# Altium PCB ESP32_Baseline_MCU.PcbDoc
Units mm, origin at the board's own origin, x right, y up, seen from the top; angles counter-clockwise.
Board outline 83 x 52.3 mm, 2 copper layers (Top Layer, Bottom Layer), stack 1.671 mm thick; 28 components, 51 nets, 173 pads, 0 vias.
Unrouted connection lines stored in the file: 118.
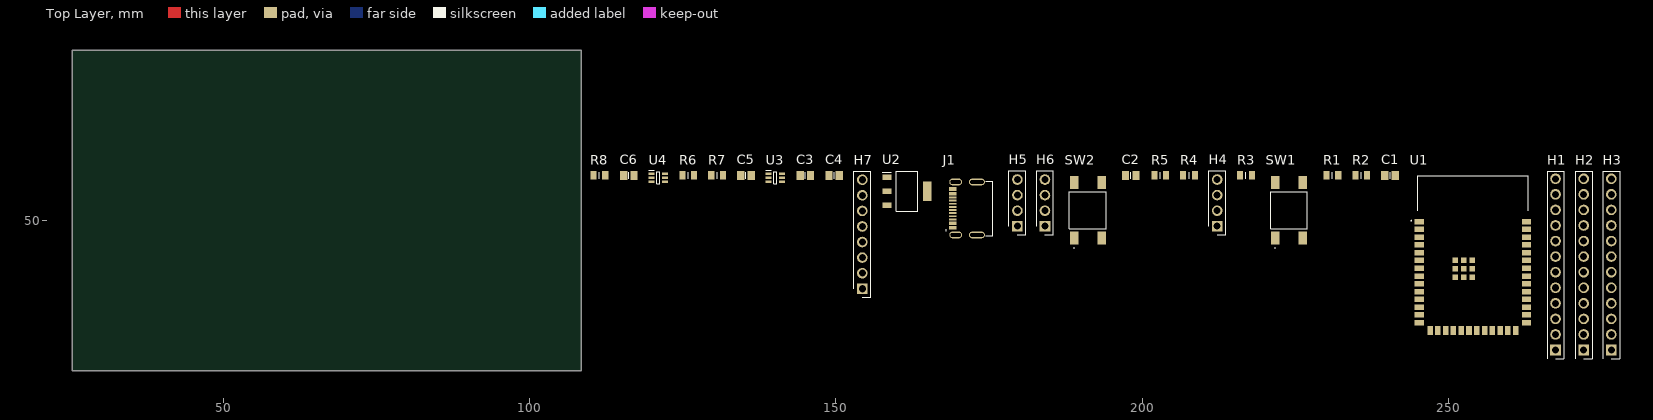
[diagram p0: Top Layer view]
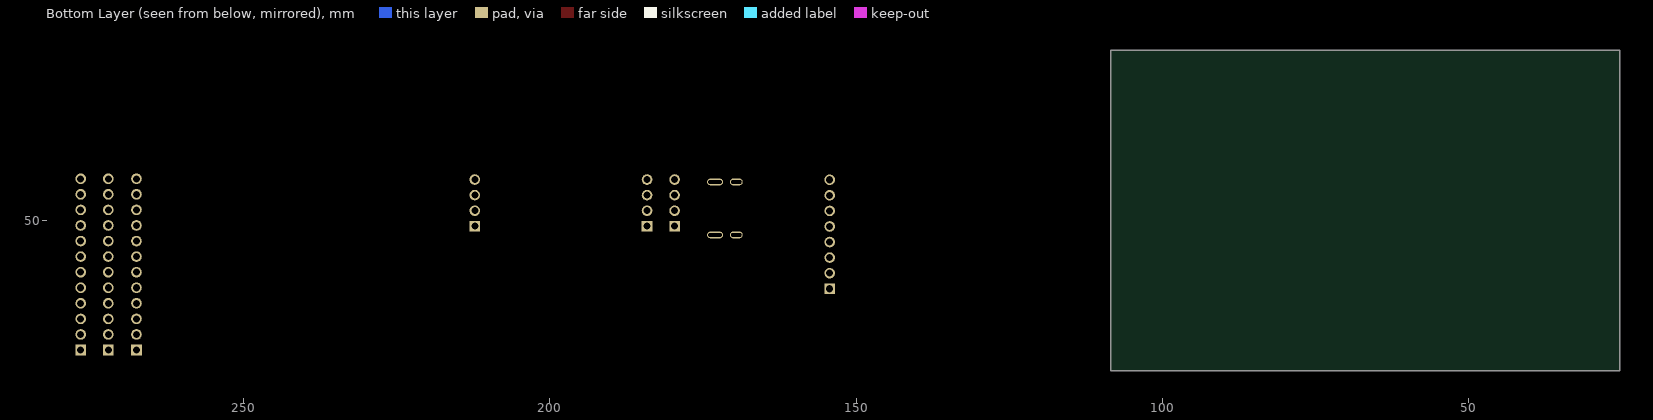
[diagram p1: Bottom Layer view, seen from below]

## Layer stack, top to bottom
Top Solder: solder mask 0.0102, Solder Resist, Dk 3.5
Top Layer: signal copper 0.0356
Dielectric 1: dielectric 1.6, FR-4, Dk 4.8
Bottom Layer: signal copper 0.0356
Bottom Solder: solder mask 0.0102, Solder Resist, Dk 3.5

## Board outline
25.4,25.4 108.4,25.4 108.4,77.7 25.4,77.7

## Design rules (kind name [scope] priority, off if disabled: settings)
Clearance [All] p1: gap=0.127 ignorepadtopadclearanceinfootprint=TRUE
ComponentClearance [All] p1: gap=0 collisioncheckmode=3 verticalgap=0.05 showdistances=FALSE
DiffPairsRouting [All] p1: maxlimit=0.254 minlimit=0.127 mostfreqgap=0.254 toplayer_minwidth=0.1 toplayer_maxwidth=0.5 toplayer_prefwidth=0.381 bottomlayer_minwidth=0.1 bottomlayer_maxwidth=0.5 bottomlayer_prefwidth=0.381 maxuncoupledlength=12.7
HoleSize [All] p1: absolutevalues=TRUE maxlimit=15 minlimit=0.025 maxpercent=80.000 minpercent=20.000
MinimumSolderMaskSliver [All] p1: minsoldermaskwidth=0
PolygonConnect [All] p1: connectstyle=Relief reliefconductorwidth=0.254 reliefentries=4 polygonreliefangle="90 Angle" airgapwidth=0.254
RoutingVias [All] p1: holewidth=0.35 width=0.7 viastyle="Through Hole" minholewidth=0.3 minwidth=0.6 maxholewidth=1 maxwidth=2
SilkToSilkClearance [All] p1: silktosilkclearance=0
SilkToSolderMaskClearance [IsPad] p1: minsilkscreentomaskgap=0 clearancetoexposedcopper=TRUE
SolderMaskExpansion [All] p1: expansion=0.102 istentingtop=FALSE
SupplyNets "Schematic Supply Nets_9" [InNet('V_MCU')] p1: voltage=0.000
SupplyNets "Schematic Supply Nets_8" [InNet('VCC_2')] p2: voltage=0.000
SupplyNets "Schematic Supply Nets_7" [InNet('VCC_1')] p3: voltage=0.000
SupplyNets "Schematic Supply Nets_6" [InNet('GND')] p4: voltage=0.000
SupplyNets "Schematic Supply Nets_4" [InNet('+3.3')] p5: voltage=0.000
Width [All] p1: maxlimit=2 minlimit=0.1 preferedwidth=0.254
24 further rules are at their usual default settings.

## Classes and differential pairs
differential pair USB_D: +USB_D_P -USB_D_N

## Components (designator, comment, footprint, x,y, rotation, side; value= is the part's Value field where it differs from the comment)
C1 "100n" CAP0805 240.4,57.3 r0 top
C2 "1u" CAP0805 198.1,57.3 r0 top
C3 "100n" CAP0805 145,57.3 r0 top
C4 "100n" CAP0805 149.7,57.3 r0 top
C5 "100n" CAP0805 135.3,57.3 r0 top
C6 "100n" CAP0805 116.2,57.3 r0 top
H1 "Header" Header_1X12 267.399,28.8 r90 top
H2 "Header" Header_1X12 271.999,28.8 r90 top
H3 "Header" Header_1X12 276.499,28.8 r90 top
H4 "4-Pin Header" Header_1X4 212.2,49 r90 top
H5 "4-Pin Header" Header_1X4 179.6,49 r90 top
H6 "4-Pin Header" Header_1X4 184.1,49 r90 top
H7 "Header" Header_1X8 154.3,38.8 r90 top
J1 "USB C" "USB TYPE C 12 PIN" 172.2,51.9 r90 top
R1 "0" RESC0805 231,57.3 r0 top
R2 "0" RESC0805 235.7,57.3 r0 top
R3 "10k" RESC0805 216.9,57.3 r0 top
R4 "0" RESC0805 207.6,57.3 r0 top
R5 "0" RESC0805 202.9,57.3 r0 top
R6 "5.11k" RESC0805 125.9,57.3 r0 top
R7 "5.11k" RESC0805 130.6,57.3 r0 top
R8 "10k" RESC0805 111.4,57.3 r0 top
SW1 "TS04-66-73-BK-100-SMT" "Tactile Button 6.0mm x 6.0mm" 223.9,51.6 r90 top
SW2 "TS04-66-73-BK-100-SMT" "Tactile Button 6.0mm x 6.0mm" 191.1,51.6 r90 top
U1 "ESP32-S3-WROOM-1-N8" ESP32-S3-WROOM-1-N8 254.299,44.5 r0 top
U2 "AZ1117CH2-3.3TRG1" SOT223 161.6,54.7 r0 top
U3 "LM66100DCKR" SC70-6 140.1,56.9 r0 top
U4 "LM66100DCKR" SC70-6 121,56.9 r0 top

## Footprints (in the part's own frame and the unit in brackets; to place one, negate y for a bottom-side part, rotate by r counter-clockwise, add the part's x,y. Pads: shape width x height; smd on the part's side, far side on the other; paste and mask are expansions set on the pad)
CAP0805 [mm] "Chip Capacitor, 2-Leads, Body 2.00x1.20mm, IPC Medium Density"
  rect 1.2x1.45 smd: 1(-0.85,0) 2(0.85,0)
  silkscreen extent 0,-0.53 0,0.53, body extent -1,-0.63 1,0.63, height 1.1
ESP32-S3-WROOM-1-N8 [mm]
  rect 1.5x0.9 smd: 1(-9.131,5.26) 2(-9.131,3.99) 3(-9.131,2.72) 4(-9.131,1.45) 5(-9.131,0.18) 6(-9.131,-1.09) 7(-9.131,-2.36) 8(-9.131,-3.63) 9(-9.131,-4.9) 10(-9.131,-6.17) 11(-9.131,-7.44) 12(-9.131,-8.71) 13(-9.131,-9.98) 14(-9.131,-11.25) 27(8.369,-11.25) 28(8.369,-9.98) 29(8.369,-8.71) 30(8.369,-7.44) 31(8.369,-6.17) 32(8.369,-4.9) 33(8.369,-3.63) 34(8.369,-2.36) 35(8.369,-1.09) 36(8.369,0.18) 37(8.369,1.45) 38(8.369,2.72) 39(8.369,3.99) 40(8.369,5.26)
  rect 0.9x1.5 smd: 15(-7.366,-12.5) 16(-6.096,-12.5) 17(-4.826,-12.5) 18(-3.556,-12.5) 19(-2.286,-12.5) 20(-1.016,-12.5) 21(0.254,-12.5) 22(1.524,-12.5) 23(2.794,-12.5) 24(4.064,-12.5) 25(5.334,-12.5) 26(6.604,-12.5)
  rect 0.9x0.9 smd: 41(-1.881,-2.46) 42(-1.881,-1.06) 43(-3.281,-1.06) 44(-3.281,-2.46) 45(-3.281,-3.86) 46(-1.881,-3.86) 47(-0.481,-3.86) 48(-0.481,-2.46) 49(-0.481,-1.06)
  silkscreen extent -10.48,5.35 8.62,12.75, body extent -9.38,-12.75 8.62,12.75, height 2.7
Header_1X4 [mm]
  rect 1.725x1.725 hole 1.15: 1(0,0)
  round 1.725 hole 1.15: 2(2.54,0) 3(5.08,0) 4(7.62,0)
  silkscreen extent -1.42,-1.37 9.04,1.37
Header_1X8 [mm]
  rect 1.725x1.725 hole 1.15: 1(0,0)
  round 1.725 hole 1.15: 2(2.54,0) 3(5.08,0) 4(7.62,0) 5(10.16,0) 6(12.7,0) 7(15.24,0) 8(17.78,0)
  silkscreen extent -1.42,-1.37 19.18,1.37
Header_1X12 [mm]
  rect 1.725x1.725 hole 1.15: 1(0,0)
  round 1.725 hole 1.15: 2(2.54,0) 3(5.08,0) 4(7.62,0) 5(10.16,0) 6(12.7,0) 7(15.24,0) 8(17.78,0) 9(20.32,0) 10(22.86,0) 11(25.4,0) 12(27.94,0)
  silkscreen extent -1.42,-1.37 29.21,1.37
RESC0805 [mm] "Chip Resistor, 2-Leads, Body 2.00x1.20mm, IPC Medium Density"
  rect 1x1.4 smd: 1(-0.95,0) 2(0.95,0)
  silkscreen extent 0,-0.53 0,0.53, body extent -1,-0.63 1,0.63, height 0.5
SC70-6 [mm]
  rect 0.95x0.45 smd: 1(-1.1,0.65) 2(-1.1,0) 3(-1.1,-0.65) 4(1.1,-0.65) 5(1.1,0) 6(1.1,0.65)
  silkscreen extent -1.58,-1 0.28,1.22, body extent -1.05,-1 1.05,1, height 1
SOT223 [mm]
  rect 1.45x0.95 smd: 1(-3.3,2.29) 2(-3.3,0) 3(-3.3,-2.29)
  rect 1.45x3.25 smd: 4(3.3,0)
  silkscreen extent -4.03,-3.25 1.75,3.25, body extent -3.35,-3.15 3.35,3.15, height 1.8
"Tactile Button 6.0mm x 6.0mm" [mm]
  rect 2.1x1.4 smd: 1(-4.55,2.25) 2(4.55,2.25) 3(-4.55,-2.25) 4(4.55,-2.25)
  silkscreen extent -6.2,-3 3,3, body extent -5,-3 5,3, height 7.4
"USB TYPE C 12 PIN" [mm]
  oval 1.1x2.6 hole 0.6 slot 2.2 at 90 deg: 1(-4.32,-0.8) 16(4.32,-0.8)
  oval 1.1x2.1 hole 0.6 slot 1.7 at 90 deg: 2(-4.318,2.667) 15(4.318,2.667)
  rect 0.6x1.2 smd: 3(3.175,3.175) 4(2.413,3.175) 13(-2.413,3.175) 14(-3.175,3.175)
  rect 0.3x1.2 smd: 5(1.778,3.175) 6(1.27,3.175) 7(0.762,3.175) 8(0.254,3.175) 9(-0.254,3.175) 10(-0.762,3.175) 11(-1.27,3.175) 12(-1.778,3.175)
  silkscreen extent -4.47,-3.4 4.47,4.32, body extent -4.34,-3.47 4.6,3.43, height 3.26

## Part data
C1 C2 C3 C4 C5 C6: library part "Capacitor - Non Polarized", "Non Polarized Capacitor"
H1 H2 H3: library part "12-Pin Header", "12-Pin Header"
H7: library part "8-Pin Header", "8-Pin Header", System=Connector
J1: library part "USB Type C Connector 12 Pin"
R1 R2 R3 R4 R5 R6 R7 R8: library part Resistor, "Resistor"
SW1 SW2: "Switch", Manufacturer_Name="Same Sky", Mouser Part Number=179-TS046673BK100SMT, Arrow Part Number=TS04-66-73-BK-100-SMT, Arrow Price/Stock=https://www.arrow.com/en/products/ts04-66-73-bk-100-smt/cui-devices?utm_currency=USD&region=nac, Datasheet Link=https://www.sameskydevices.com/product/resource/supplyframepdf/ts04.pdf, Height=7.6mm, Manufacturer_Part_Number=TS04-66-73-BK-100-SMT, Mouser Price/Stock=https://www.mouser.co.uk/ProductDetail/Same-Sky/TS04-66-73-BK-100-SMT?qs=A6eO%252BMLsxmRAmp3wqRUzZw%3D%3D
U1: "ESP32 Microcontroller with Bluetooth and Wifi"
U2: library part AZ1117CH2-3.3TRG1_1, "3.3V Linear Voltage Regulator"
U3 U4: "5.5-V, 1.5-A 79-mΩ, Low IQ Ideal Diode With Input Polarity Protection", Manufacturer_Name="Texas Instruments", Mouser Part Number=595-LM66100DCKR, Arrow Part Number=LM66100DCKR, Arrow Price/Stock=https://www.arrow.com/en/products/lm66100dckr/texas-instruments?region=nac, Datasheet Link=http://www.ti.com/lit/gpn/LM66100, Height=1.1mm, Manufacturer_Part_Number=LM66100DCKR, Mouser Price/Stock=https://www.mouser.co.uk/ProductDetail/Texas-Instruments/LM66100DCKR?qs=vLWxofP3U2y2yPPrXoBBoA%3D%3D

## Nets (pads, with @x,y where several pads share a name; then routed paths per layer and width w, separated by ;. In a path a pad name is that pad's centre, name@x,y a point inside that pad or via, vN(x,y) a via of type N, cw(c..) or ccw(c..) an arc to the next point about the centre after c; other vN are vias at no path point)
+3.3: C1.1 C5.1 C6.1 H1.1 H4.1 H5.1 H5.2 H5.3 H5.4 R3.1 U1.2 U3.6 U4.6
EXT_SUPP_EN: R8.1 U3.5 U4.3
GND: C1.2 C2.2 C3.2 C4.2 C5.2 C6.2 H4.4 H6.1 H6.2 H6.3 H6.4 H7.1 H7.3 H7.5 H7.6 H7.8 J1.1 J1.2 J1.3 J1.14 J1.15 J1.16 R6.1 R7.1 SW1.1 SW1.2 SW2.1 SW2.2 U1.1 U1.40 U1.41 U1.42 U1.43 U1.44 U1.45 U1.46 U1.47 U1.48 U1.49 U2.2 U2.4 U3.2 U4.2 U4.5
GPIO1: H2.1 U1.39
GPIO2: H2.2 U1.38
GPIO3: H3.1 U1.15
GPIO4: H1.2 U1.4
GPIO5: H1.3 U1.5
GPIO6: H1.4 U1.6
GPIO7: H1.5 U1.7
GPIO8: H1.10 U1.12
GPIO9: H3.3 U1.17
GPIO10: H3.4 U1.18
GPIO11: H3.5 U1.19
GPIO12: H3.6 U1.20
GPIO13: H3.7 U1.21
GPIO14: H3.8 U1.22
GPIO15: H1.6 U1.8
GPIO16: H1.7 U1.9
GPIO17: H1.8 U1.10
GPIO18: H1.9 U1.11
GPIO19: H1.11 R1.1
GPIO20: H1.12 R2.1
GPIO21: H3.9 U1.23
GPIO35: H2.12 U1.28
GPIO36: H2.11 U1.29
GPIO37: H2.10 U1.30
GPIO38: H2.9 U1.31
GPIO39: H2.8 U1.32
GPIO40: H2.7 U1.33
GPIO41: H2.6 U1.34
GPIO42: H2.5 U1.35
GPIO45: H3.12 U1.26
GPIO46: H3.2 U1.16
GPIO47: H3.10 U1.24
GPIO48: H3.11 U1.25
MCU_BOOT: SW2.3 SW2.4 U1.27
MCU_EN: C2.1 R3.2 SW1.3 SW1.4 U1.3
NetC3_1: C3.1 J1.4 J1.13 U2.1
NetH4_2: H4.2 R4.2
NetH4_3: H4.3 R5.2
NetJ1_5: J1.5 R6.2
NetJ1_11: J1.11 R7.2
UPDI_RX: H2.4 R4.1 U1.36
UPDI_TX: H2.3 R5.1 U1.37
USB_D_N: J1.8 J1.10 R1.2 U1.13
USB_D_P: J1.7 J1.9 R2.2 U1.14
USB_SUPP_EN: C4.1 U2.3 U3.3 U4.1
V_MCU: H7.7 R8.2 U3.1
VCC_1: H7.2
VCC_2: H7.4
pads on no net: J1.6 J1.12 U3.4 U4.4